# Altium PCB Sensor_Box_PoE_discrete.PCBDOC
Units mm, origin at the board's own origin, x right, y up, seen from the top; angles counter-clockwise.
Board outline 21.65 x 73.05 mm, 2 copper layers (Top, Bot), stack 1.571 mm thick; 64 components, 47 nets, 193 pads, 0 vias.
Unrouted connection lines stored in the file: 125.
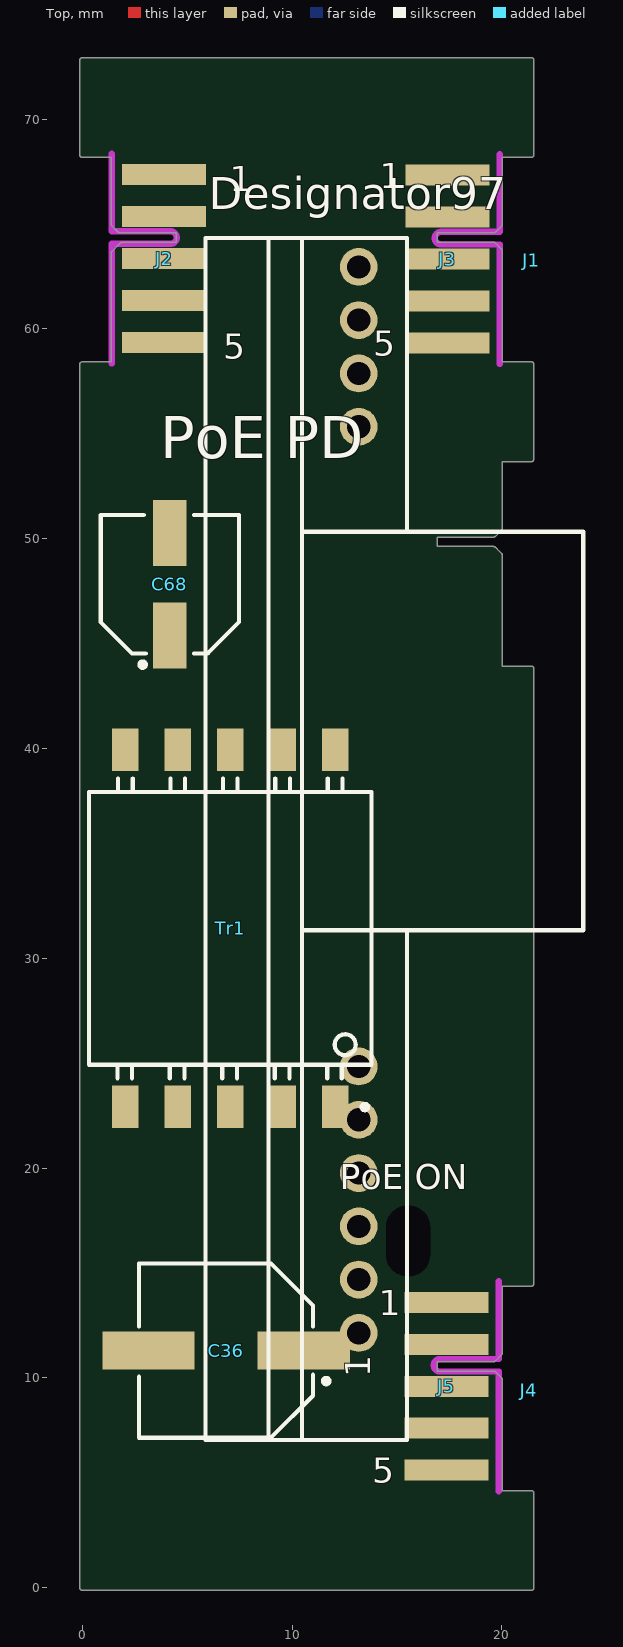
[diagram p0: Top view]
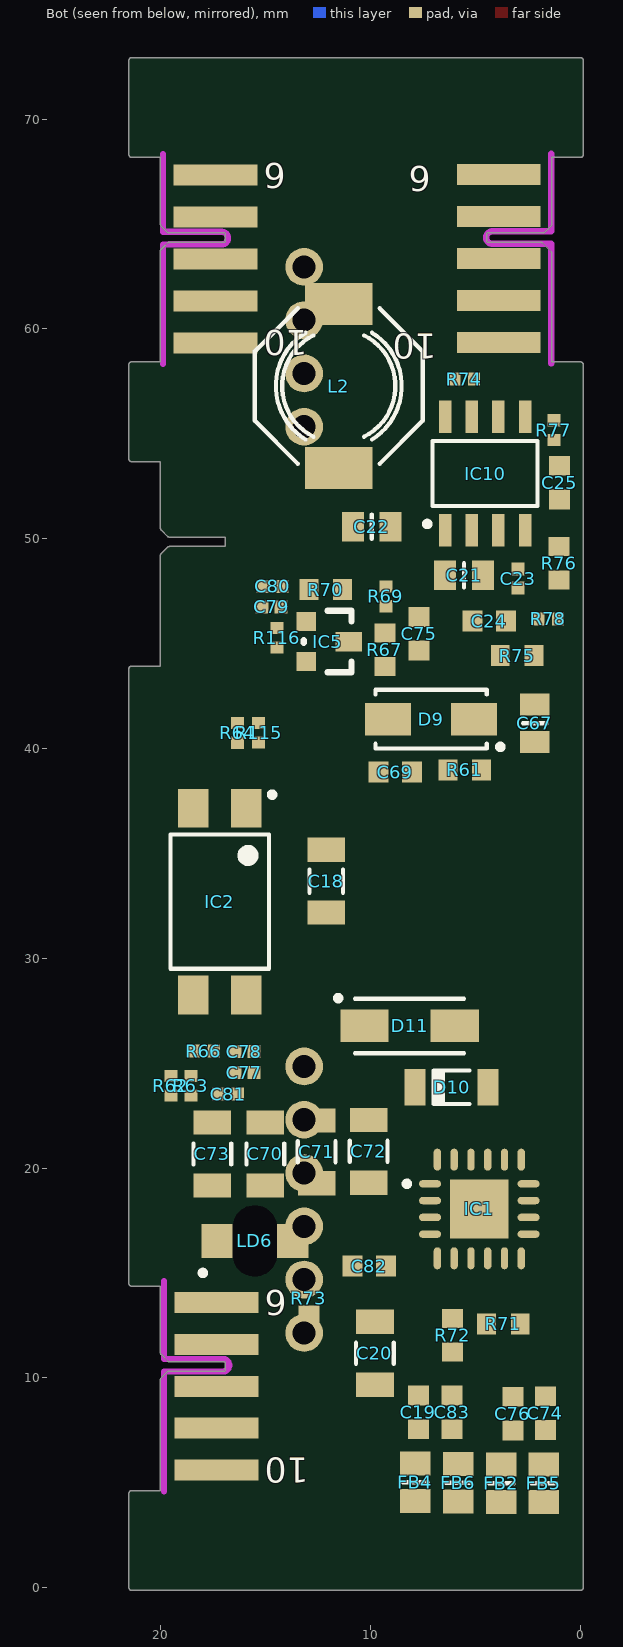
[diagram p1: Bot view, seen from below]

## Layer stack, top to bottom
TopSolder: solder mask 0.0102, Solder Resist, Dk 3.5
Top: signal copper 0.0356
Dielectric1: core 1.5, FR-4, Dk 4.8
Bot: signal copper 0.0356
BottomSolder: solder mask 0.0102, Solder Resist, Dk 3.5

## Board outline
0.002,-0.127 cw(c0,0) -0.127,0 -0.127,0.35 cw(c0,0.35) -0.127,0.351 -0.127,43.8 cw(c0,43.8) -0.127,43.802 -0.127,58.3 cw(c0,58.3) 0,58.427 1.373,58.427 1.373,63.6 cw(c1.5,63.6) 1.41,63.69 1.81,64.09 1.809,64.09 cw(c1.9,64) 1.9,64.127 4.473,64.127 4.473,64.573 1.8,64.573 cw(c1.8,64.7) 1.709,64.61 1.71,64.61 1.41,64.91 1.41,64.909 cw(c1.5,65) 1.373,65 1.373,68.173 0,68.173 cw(c0,68.3) -0.127,68.3 -0.127,72.8 cw(c0,72.8) 0,72.927 21.4,72.927 cw(c21.4,72.8) 21.527,72.8 21.527,68.3 cw(c21.4,68.3) 21.4,68.173 20.027,68.173 20.027,65 cw(c19.9,65) 19.99,64.909 19.99,64.91 19.69,64.61 19.691,64.61 cw(c19.6,64.7) 19.6,64.573 16.927,64.573 16.927,64.127 19.6,64.127 cw(c19.6,64) 19.691,64.09 19.69,64.09 19.891,63.89 ccw(c19.8,63.8) 19.89,63.89 ccw(c19.8,63.8) 19.89,63.89 19.891,63.89 19.99,63.79 cw(c19.9,63.7) 20.027,63.7 20.027,58.427 21.4,58.427 cw(c21.4,58.3) 21.527,58.3 21.527,53.8 cw(c21.4,53.8) 21.4,53.673 20.027,53.673 20.027,50.5 cw(c19.9,50.5) 19.99,50.409 19.99,50.41 19.69,50.11 19.691,50.11 cw(c19.6,50.2) 19.6,50.073 16.927,50.073 16.927,49.627 19.6,49.627 cw(c19.6,49.5) 19.691,49.59 19.69,49.59 19.891,49.39 ccw(c19.8,49.3) 19.89,49.39 ccw(c19.8,49.3) 19.89,49.39 19.891,49.39 19.99,49.29 cw(c19.9,49.2) 20.027,49.2 20.027,43.927 21.4,43.927 cw(c21.4,43.8) 21.527,43.8 21.527,14.5 cw(c21.4,14.5) 21.4,14.373 20.027,14.373 20.027,11.2 cw(c19.9,11.2) 19.99,11.109 19.99,11.11 19.69,10.81 cw(c19.6,10.9) 19.6,10.773 16.927,10.773 16.927,10.327 19.6,10.327 cw(c19.6,10.2) 19.69,10.29 19.99,9.99 cw(c19.9,9.9) 20.027,9.9 20.027,4.627 21.4,4.627 cw(c21.4,4.5) 21.527,4.5 21.527,0 ccw(c21.4,0) 21.527,0.001 21.527,0 cw(c21.4,0) 21.519,-0.045 cw(c21.4,0) 21.398,-0.127

## Design rules (kind name [scope] priority, off if disabled: settings)
Clearance Clearance_DIFF [(InDifferentialPairClass('All Differential Pairs'))] p1: gap=0.127 ignorepadtopadclearanceinfootprint=FALSE except(0: Arc-Hole Track-Hole SMDPad-Hole THPad-Hole Via-Hole Fill-Hole Poly-Hole Region-Hole Text-Hole; 0.254: Arc-Poly Track-Poly SMDPad-Poly THPad-Poly Via-Poly Fill-Poly Poly-Poly Poly-Region Poly-Text)
Clearance [All] p2: gap=0.127 ignorepadtopadclearanceinfootprint=FALSE except(0: Arc-Hole Track-Hole SMDPad-Hole THPad-Hole Via-Hole Fill-Hole Poly-Hole Region-Hole Text-Hole; 0.381: Arc-Poly Track-Poly SMDPad-Poly THPad-Poly Via-Poly Fill-Poly Poly-Poly)
DiffPairsRouting [All] p1: maxlimit=0.254 minlimit=0.127 mostfreqgap=0.127 toplayer_minwidth=0.127 toplayer_maxwidth=0.381 toplayer_prefwidth=0.254 bottomlayer_minwidth=0.127 bottomlayer_maxwidth=0.381 bottomlayer_prefwidth=0.254 maxuncoupledlength=12.7
FabricationTestPointUsage TestPointUsage [All] p1: valid=0 allowmultiple=FALSE
FabricationTestpoint Testpoint [All] p1: side=3 testpointundercomponent=TRUE minsize=1.016 maxsize=2.54 preferedsize=1.524 minholesize=0.508 maxholesize=1.016 preferedholesize=0.813 testpointgrid=0.025 allowsidetop=TRUE allowsidebottom=TRUE usegrid=TRUE gridtolerance=0
HoleSize [All] p1: absolutevalues=TRUE maxlimit=3.81 minlimit=0.025 maxpercent=80.000 minpercent=20.000
HoleToHoleClearance [All] p1: gap=0.025 allowstackedmicrovias=TRUE
MinimumSolderMaskSliver [All] p1: minsoldermaskwidth=0
PlaneClearance [All] p1: clearance=0.254
PlaneConnect [All] p1: planeconnectstyle=Direct reliefexpansion=0.508 reliefentries=4 reliefconductorwidth=0.254 reliefairgap=0.254
PolygonConnect PolygonConnect_pad [(InPadClass('All Pads'))] p1: connectstyle=Relief reliefconductorwidth=0.254 reliefentries=4 polygonreliefangle="90 Angle" airgapwidth=0.254
PolygonConnect [All] p2: connectstyle=Direct reliefconductorwidth=0.254 reliefentries=4 polygonreliefangle="45 Angle" airgapwidth=0.254
RoomDefinition Sensor_Box_PoE [InComponentClass('Sensor_Box_PoE')] p1 off: confinementstyle=ConfineIn formatcopy=TRUE lockcomponents=FALSE outline 69.55,15.15 252.299,15.15 252.299,38.9 69.55,38.9
RoutingVias [All] p1: holewidth=0.2 width=0.5 viastyle="Through Hole" minholewidth=0.2 minwidth=0.5 maxholewidth=0.711 maxwidth=1.27
SilkToSilkClearance [All] p1: silktosilkclearance=0
SilkToSolderMaskClearance SilkscreenOverComponentPads [IsPad] p1: minsilkscreentomaskgap=0 clearancetoexposedcopper=TRUE
SolderMaskExpansion [All] p1: expansion=0.051
Width [All] p1: maxlimit=1.27 minlimit=0.127 preferedwidth=0.127
20 further rules are at their usual default settings.

## Components (designator, comment, footprint, x,y, rotation, side; value= is the part's Value field where it differs from the comment)
C18 "1nF" CAPC3216X180N 12.125,33.675 r90 bottom
C19 "1nF" CAPC1608X87N 7.725,8.35 r270 bottom
C20 "100nF" CAPC3216X140N 9.8,11.175 r90 bottom
C21 "10uF" CAPC2012X135N 5.55,48.25 r0 bottom
C22 "10uF" CAPC2012X135N 9.95,50.575 r180 bottom
C23 "100nF" CAPC1005X55N 2.975,48.1 r270 bottom
C24 "150pF" CAPC1608X87N 4.35,46.075 r0 bottom
C25 "3.9nF" CAPC1608X87N 1,52.675 r90 bottom
C36 "10uF" CAPAE830X1020N 6.85,11.3 r180 top
C67 "10uF" CAPC2012X135N 2.175,41.2 r270 bottom
C68 "100uF" CAPAE660X540N 4.175,47.825 r90 top
C69 "68pF" CAPC1608X87N 8.825,38.875 r180 bottom
C70 "100nF" CAPC3216X140N 15.025,20.675 r270 bottom
C71 "100nF" CAPC3216X140N 12.575,20.775 r270 bottom
C72 "100nF" CAPC3216X140N 10.1,20.8 r270 bottom
C73 "100nF" CAPC3216X140N 17.55,20.675 r270 bottom
C74 "1nF" CAPC1608X87N 1.675,8.325 r90 bottom
C75 "3.9nF" CAPC1608X87N 7.7,45.475 r270 bottom
C76 "1nF" CAPC1608X87N 3.225,8.3 r270 bottom
C77 "100nF" CAPC1005X55N 16.025,24.55 r0 bottom
C78 "100nF" CAPC1005X55N 16.025,25.55 r0 bottom
C79 "100nF" CAPC1005X55N 14.725,46.75 r0 bottom
C80 "100nF" CAPC1005X55N 14.675,47.725 r0 bottom
C81 "100nF" CAPC1005X55N 16.8,23.525 r0 bottom
C82 "1uF" CAPC1608X87N 10.075,15.325 r180 bottom
C83 "1nF" CAPC1608X87N 6.125,8.35 r90 bottom
D9 "SS16" DIOM5127X229N 7.125,41.4 r0 bottom
D10 "PMLL4148L" DIOMELF3515N 6.15,23.85 r180 bottom
D11 "SMAJ24A" DIOM5226X262N 8.15,26.775 r180 bottom
Designator97 "Comment" SILVERTEL_AG5300 13.175,37.55 r90 top
FB2 "220R@100MHz" INDC2012X105N 3.775,4.975 r270 bottom
FB4 "220R@100MHz" INDC2012X105N 7.875,5.025 r270 bottom
FB5 "220R@100MHz" INDC2012X105N 1.75,4.975 r90 bottom
FB6 "220R@100MHz" INDC2012X105N 5.825,5 r90 bottom
IC1 "SI3402-B-GM" QFN80P500X500X80-21N-S280 4.825,18.05 r180 bottom
IC2 "SFH6106-4" SOIC254P977X406-4N 17.2,32.7 r270 bottom
IC5 "TLV431ASN1T1" SOT-23 13.075,46.05 r270 bottom
IC10 "NCP3170ADR2G" SOIC127P600X175-8N 4.55,53.1 r90 bottom
J1 "Family" "AVX_00 9159 010 061 916" 21.4,63.275 r0 top
J2 "Family" EDGE10T1B6_P200W1000L0F100X400 3.9,67.35 r270 top
J3 "Family" EDGE10T5B10_P200W1000L0F100X400 17.4,59.325 r90 top
J4 "Family" "AVX_00 9159 010 061 916" 21.275,9.4 r180 top
J5 "Family" EDGE10T5B10_P200W1000L0F100X400 17.35,5.6 r90 top
L2 "6.8uH" IND_BOURNS_SRU8043 11.525,57.275 r270 bottom
LD6 "Green" LED_KINGBRIGHT_KPTR3216 15.525,16.525 r0 bottom
R61 "30" RESC1608X55N 5.525,38.975 r180 bottom
R62 "10k" RESC1005X40N 19.525,23.925 r270 bottom
R63 "10k" RESC1005X40N 18.575,23.925 r270 bottom
R64 "10k" RESC1005X40N 16.343,40.744 r270 bottom
R66 "300" RESC1005X40N 17.95,25.575 r0 bottom
R67 "130k" RESC1608X55N 9.325,44.7 r270 bottom
R69 "2k" RESC1005X40N 9.275,47.25 r90 bottom
R70 "15k" RESC1608X55N 12.15,47.575 r0 bottom
R71 "30" RESC1608X55N 3.675,12.575 r0 bottom
R72 "24k" RESC1608X55N 6.1,12.025 r90 bottom
R73 "24k" RESC1608X55N 12.95,13.8 r270 bottom
R74 "10k" RESC1005X40N 5.55,57.6 r180 bottom
R75 "43k" RESC1608X55N 3.025,44.425 r0 bottom
R76 "8k2" RESC1608X55N 1.025,48.825 r270 bottom
R77 "10k" RESC1005X40N 1.275,55.175 r90 bottom
R78 "1k" RESC1005X40N 1.55,46.175 r0 bottom
R115 "10k" RESC1005X40N 15.35,40.75 r270 bottom
R116 "10k" RESC1005X40N 14.475,45.275 r270 bottom
Tr1 "1:1" XFMR_COILCRAFT_FA2925-AL 7.05,31.425 r90 top (schematic designator TR1)

## Footprints (in the part's own frame and the unit in brackets; to place one, negate y for a bottom-side part, rotate by r counter-clockwise, add the part's x,y. Pads: shape width x height; smd on the part's side, far side on the other; paste and mask are expansions set on the pad)
"AVX_00 9159 010 061 916" [mm] "10 Contacts, 2mm Pitch, Open Ended Card Edge Connector, 9159 Series"
  body extent -5,-4.95 5,4.95, height 1.7
CAPAE660X540N [mm] "Capacitor, Aluminium Electrolytric, 6.6mm L X 6.6mm W X 5.4mm H, IPC Medium Density"
  rect 3.15x1.6 smd: 1(-2.45,0) 2(2.45,0)
  silkscreen extent -3.95,-3.3 3.3,3.3, body extent -3.9,-3.4 3.9,3.4, height 5.7
CAPAE830X1020N [mm] "Capacitor, Aluminium Electrolytric, 8.3mm L X 8.3mm W X 10.2mm H, IPC Medium Density"
  rect 4.4x1.8 smd: 1(-3.7,0) 2(3.7,0)
  silkscreen extent -4.9,-4.15 4.15,4.15, body extent -4.75,-4.25 5.25,4.25, height 10.2
CAPC1005X55N [mm] "Chip Capacitor, Body 1.0x0.55mm, IPC Medium Density"
  rect 0.62x0.62 smd: 1(-0.45,0) 2(0.45,0)
  body extent -0.52,-0.27 0.53,0.28, height 0.55
CAPC1608X87N [mm] "Chip Capacitor, Body 1.6x0.8mm IPC Medium Density"
  rect 0.95x1 smd: 1(-0.8,0) 2(0.8,0)
  body extent -0.87,-0.47 0.88,0.48, height 0.87
CAPC2012X135N [mm] "Chip Capacitor, Body 2.0x1.25mm, IPC Medium Density"
  rect 1.05x1.4 smd: 1(-0.9,0) 2(0.9,0)
  silkscreen extent 0,-0.58 0,0.58, body extent -1.05,-0.67 1.05,0.68, height 1.25
CAPC3216X140N [mm] "Chip Capacitor, Body 3.2x1.6mm, IPC Medium Density"
  rect 1.15x1.8 smd: 1(-1.5,0) 2(1.5,0)
  silkscreen extent -0.5,-0.9 0.5,0.9, body extent -1.7,-0.9 1.7,0.9, height 1.4
CAPC3216X180N [mm] "Chip Capacitor, Body 3.2x1.6mm, IPC Medium Density"
  rect 1.15x1.8 smd: 1(-1.5,0) 2(1.5,0)
  silkscreen extent -0.55,-0.8 0.55,0.8, body extent -1.7,-0.9 1.7,0.9, height 1.8
DIOM5127X229N [mm] "DO-214-AC/SMA Molded Diode, 2-Leads, Body 5.1x2.7mm, IPC Medium Density"
  rect 2.2x1.55 smd: 1(-2.05,0) 2(2.05,0)
  silkscreen extent -3.42,-1.4 2.65,1.45, body extent -2.67,-1.45 2.68,1.45, height 2.29
DIOM5226X262N [mm] "DO-214-AC/SMA Diode, Molded Body; 5.21mm L X 2.605mm W X 2.62mm H, IPC Medium Density"
  rect 2.3x1.55 smd: 1(-2.15,0) 2(2.15,0)
  silkscreen extent -3.53,-1.3 2.6,1.45, body extent -2.6,-1.3 2.6,1.31, height 2.62
DIOMELF3515N [mm] "SOD80C, MELF Diode, 2-Leads, Body 3.5x1.5mm, IPC Medium Density"
  rect 1x1.75 smd: 1(-1.75,0) 2(1.75,0)
  silkscreen extent -0.85,-0.8 0.85,0.8, body extent -1.85,-0.8 1.85,0.8, height 1.6
EDGE10T1B6_P200W1000L0F100X400 [mm] "10 contacts Board Edge Connector, First Left Top Pad 1, First Left Bottom Pad 2, Pitch 2mm, Length 0mm, Width 10mm, Finger Lenght 4mm, Finger Width 1mm"
  rect 1x4 smd paste-0.5: 1(0,0) 2(2,0) 3(4,0) 4(6,0) 5(8,0)
  rect 1x4 smd far side paste-0.5: 6(0,0) 7(2,0) 8(4,0) 9(6,0) 10(8,0)
  KeepOutLayer lines w0.3: 9,-2.5 3.3,-2.5 3.3,0.3 ccw(c3,0.3) 2.7,0.3 2.7,-2.5 -1,-2.5
EDGE10T5B10_P200W1000L0F100X400 [mm] "10 contacts Board Edge Connector, First Left Top Pad 5, First Left Bottom Pad 10, Pitch 2mm, Length 0mm, Width 10mm, Finger Lenght 4mm, Finger Width 1mm"
  rect 1x4 smd paste-0.5: 1(8,0) 2(6,0) 3(4,0) 4(2,0) 5(0,0)
  rect 1x4 smd far side paste-0.5: 6(8,0) 7(6,0) 8(4,0) 9(2,0) 10(0,0)
  KeepOutLayer lines w0.3: -1,-2.5 4.7,-2.5 4.7,0.3 cw(c5,0.3) 5.3,0.3 5.3,-2.5 9,-2.5
IND_BOURNS_SRU8043 [mm] "SMD Inductor Body Width 8.3mm Body Lenght 8.3mm Height 4.6mm"
  rect 2x3.2 smd: 1(-3.9,0) 2(3.9,0)
  silkscreen extent -3.71,-4 3.71,4, body extent -4,-4 4,4, height 4.3
INDC2012X105N [mm] "Chip Inductor, EIA 0805, Metric 2012, Body 2.0x1.25mm, IPC Medium Density"
  rect 1.15x1.45 smd: 1(-0.9,0) 2(0.9,0)
  silkscreen extent 0,-0.6 0,0.6, body extent -1.1,-0.7 1.1,0.7, height 1.1
LED_KINGBRIGHT_KPTR3216 [mm] "Reverse Mount LED 3216, Hole 2.1x2.3mm 0.35mm Height"
  rect 1.5x1.6 smd: 1(1.8,0) 2(-1.8,0)
  oval 1.9x3.2 hole 2.1 slot 3.4 at 90 deg unplated mask+0.1: 3(0,0)
  silkscreen extent 2.35,1.4 2.6,1.65, body extent -1.6,-0.8 1.6,0.8, height 0.25
QFN80P500X500X80-21N-S280 [mm] "QFN, 0.80mm Pitch, Square 20 Pin, 5.00mm L X 5.00mm W X 0.80mm H body (W/Thermal Tab 2.8mm X 2.8mm), IPC Medium Density"
  oval 1.05x0.35 smd: 1(-2.35,1.2) 2(-2.35,0.4) 3(-2.35,-0.4) 4(-2.35,-1.2) 11(2.35,-1.2) 12(2.35,-0.4) 13(2.35,0.4) 14(2.35,1.2)
  oval 0.35x1.05 smd: 5(-2,-2.35) 6(-1.2,-2.35) 7(-0.4,-2.35) 8(0.4,-2.35) 9(1.2,-2.35) 10(2,-2.35) 15(2,2.35) 16(1.2,2.35) 17(0.4,2.35) 18(-0.4,2.35) 19(-1.2,2.35) 20(-2,2.35)
  rect 2.8x2.8 smd: 21(0,0)
  silkscreen extent -3.58,1.08 -3.33,1.32, body extent -2.55,-2.55 2.55,2.55, height 0.9
RESC1005X40N [mm] "Chip Resistor, EIA 0402, Metric 1005, Body 1.0x0.5mm, IPC Medium Density"
  rect 0.58x0.62 smd: 1(-0.47,0) 2(0.47,0)
  body extent -0.52,-0.27 0.53,0.28, height 0.4
RESC1608X55N [mm] "Chip Resistor, EIA 0603, Metric 1608, Body 1.6x0.8mm, IPC Medium Density"
  rect 0.9x1 smd: 1(-0.8,0) 2(0.8,0)
  body extent -0.87,-0.47 0.88,0.48, height 0.55
SILVERTEL_AG5300 [mm] "Power-over-Ethernet Plus (POE+) Module, Body L 57.3mm x W 18mm x H 14mm"
  round 1.8 hole 1.1: 1(-25.406,0) 2(-22.866,0) 3(-20.326,0) 4(-17.786,0) 5(-15.246,0) 6(-12.706,0) 7(17.786,0) 8(20.326,0) 9(22.866,0) 10(25.406,0)
  silkscreen extent -30.52,-10.7 26.78,7.3, body extent -30.52,-10.7 26.78,7.3, height 14
SOIC127P600X175-8N [mm] "SOIC 8, Pitch 1.27mm - Body 4x5mm, IPC Medium Density"
  rect 1.55x0.6 smd: 1(-2.7,1.905) 2(-2.7,0.635) 3(-2.7,-0.635) 4(-2.7,-1.905) 5(2.7,-1.905) 6(2.7,-0.635) 7(2.7,0.635) 8(2.7,1.905)
  silkscreen extent -2.52,-2.5 1.55,2.88, body extent -3.1,-2.5 3.1,2.5, height 1.75
SOIC254P977X406-4N [mm] "SOIC, 2.54mm pitch; 4 pin, 6.65mm W X 4.69mm L, IPC Medium Density"
  rect 1.85x1.45 smd: 1(-4.45,1.27) 2(-4.45,-1.27) 3(4.45,-1.27) 4(4.45,1.27)
  silkscreen extent -5.22,-2.35 3.2,2.62, body extent -5.01,-2.41 5.02,2.42, height 4.06
SOT-23 [mil]
  rect 36x36 smd: 1(0,0) 2(75,0)
  rect 36x50 smd: 3(38,80)
  silkscreen extent -20,-5 95,85, body extent -21,-5 97,93, height 47
XFMR_COILCRAFT_FA2925-AL [mm] "Flyback Transformer, Body 13 x 13.46mm"
  rect 2.03x1.27 smd: 1(-8.51,-5) 2(-8.51,-2.5) 3(-8.51,0) 4(-8.51,2.5) 5(-8.51,5) 6(8.51,5) 7(8.51,2.5) 8(8.51,0) 9(8.51,-2.5) 10(8.51,-5)
  silkscreen extent -8.64,-6.73 7.14,6.73, body extent -8.87,-6.73 8.88,6.73, height 12.7

## Part data
C18: library part CC1206_1NF_2KV_10%_X7R, "Non-polarised capacitor", Case=1206, Manufacturer=GENERIC, Manufacturer1 ComponentHeight=1.8mm, Manufacturer1 Example=AVX, Manufacturer1 Part Number=1206GC102KAT2A, Tolerance=±10%, Voltage=2kV, Author="CERN DEM JLC", Component Type=Standard, CreateDate=19.11.2012, HelpURL=\\cern.ch\dfs\Applications\Altium\Datasheets\CC1206_X7R_AVX_HV-MLC.pdf, LatestRevisionDate=17.05.2017, Manufacturer Part Number=CC1206_1NF_2KV_10%_X7R, Mounted=Yes, Part Description="High Voltage MLC Chip Capacitor", Part Number=CC1206_1NF_2KV_10%_X7R, Pin Count=2, Sense=No, SMD=Yes, Socket=No, Status=None, TC=X7R
C19 C74 C76 C83: library part CC0603_1NF_100V_10%_X7R, "Non-polarised capacitor", Case=0603, Manufacturer=GENERIC, Manufacturer1 ComponentHeight=0.87mm, Manufacturer1 Example=KEMET, Manufacturer1 Part Number=C0603C102K1RACTU, Tolerance=±10%, Voltage=100V, Author="CERN DEM JLC", Component Type=Standard, CreateDate=12.12.2013, HelpURL=\\cern.ch\dfs\Applications\Altium\Datasheets\CC0603_X7R_KEMET.pdf, LatestRevisionDate=12.12.2013, Manufacturer Part Number=CC0603_1NF_100V_10%_X7R, Mounted=Yes, Part Description="SMD Multilayer Chip Ceramic Capacitor", Part Number=CC0603_1NF_100V_10%_X7R, Pin Count=2, Sense=No, SMD=Yes, Socket=No, Status=Preferred, TC=X7R
C20 C70 C71 C72 C73: library part CC1206_100NF_100V_10%_X7R, "Non-polarised capacitor", Case=1206, Manufacturer=GENERIC, Manufacturer1 ComponentHeight=1.25mm, Manufacturer1 Example=PHYCOMP, Manufacturer1 Part Number=222260115649, Tolerance=±10%, Voltage=100V, Author="CERN DEM JLC", Component Type=Standard, CreateDate=24.08.2009, HelpURL=\\cern.ch\dfs\Applications\Altium\Datasheets\CC1206_X7R_PHYCOMP.pdf, LatestRevisionDate=24.08.2009, Manufacturer Part Number=CC1206_100NF_100V_10%_X7R, Mounted=Yes, Part Description="SMD Multilayer Chip Ceramic Capacitor", Part Number=CC1206_100NF_100V_10%_X7R, Pin Count=2, Sense=No, SMD=Yes, Socket=No, Status=Preferred, TC=X7R
C21 C22 C67: library part CC0805_10UF_10V_10%_X7R, "Non-polarised capacitor", Case=0805, Manufacturer=GENERIC, Manufacturer1 ComponentHeight=1.35mm, Manufacturer1 Example=MURATA, Manufacturer1 Part Number=GRM21BR71A106KE51L, Tolerance=±10%, Voltage=10V, Author="CERN DEM JLC", Component Type=Standard, CreateDate=2012-04-30, HelpURL=\\cern.ch\dfs\Applications\Altium\Datasheets\CC0805_X7R_MURATA.pdf, LatestRevisionDate=2012-04-30, Manufacturer Part Number=CC0805_10UF_10V_10%_X7R, Mounted=Yes, Part Description="SMD Multilayer Chip Ceramic Capacitor", Part Number=CC0805_10UF_10V_10%_X7R, Pin Count=2, SMD=Yes, Socket=No, Status=Preferred, Table="Capacitors SMD", TC=X7R
C23 C77 C78 C79 C80 C81: library part CC0402_100NF_16V_10%_X5R, "Non-polarised capacitor", Case=0402, Manufacturer=GENERIC, Manufacturer1 ComponentHeight=0.55mm, Manufacturer1 Example=MURATA, Manufacturer1 Part Number=GRM155R61C104KA88D, Tolerance=±10%, Voltage=16V, Author="CERN DEM JLC", Component Type=Standard, CreateDate=10.12.2013, HelpURL=\\cern.ch\dfs\Applications\Altium\Datasheets\CC0402_X5R_MURATA_GRM.pdf, LatestRevisionDate=10.12.2013, Manufacturer Part Number=CC0402_100NF_16V_10%_X5R, Mounted=Yes, Part Description="SMD Multilayer Chip Ceramic Capacitor", Part Number=CC0402_100NF_16V_10%_X5R, Pin Count=2, Sense=No, SMD=Yes, Socket=No, Status=None, TC=X5R
C24: library part CC0603_150PF_50V_1%_NP0, "Non-polarised capacitor", Case=0603, Manufacturer=GENERIC, Manufacturer1 ComponentHeight=0.7mm, Manufacturer1 Example=PHYCOMP, Manufacturer1 Part Number=CC0603FRNPO9BN151, Tolerance=±1%, Voltage=50V, Author="CERN DEM MR", Component Type=Standard, CreateDate=17.02.2016, HelpURL=\\cern.ch\dfs\Applications\Altium\Datasheets\CC0805_NP0_PHYCOMP_16VTO50V.pdf, LatestRevisionDate=17.02.2016, Manufacturer Part Number=CC0603_150PF_50V_1%_NP0, Mounted=Yes, Part Description="SMD Multilayer Chip Ceramic Capacitor", Part Number=CC0603_150PF_50V_1%_NP0, Pin Count=2, Sense=No, SMD=Yes, Socket=No, Status=None, TC=C0G/NP0
C25 C75: library part CC0603_3.9NF_50V_5%_X7R, "Non-polarised capacitor", Case=0603, Manufacturer=GENERIC, Manufacturer1 ComponentHeight=0.87mm, Manufacturer1 Example=PHYCOMP, Manufacturer1 Part Number=223858615631, Tolerance=±5%, Voltage=50V, Author="CERN DEM JLC", Component Type=Standard, CreateDate=03.12.2007, HelpURL=\\cern.ch\dfs\Applications\Altium\Datasheets\CC0603_X7R_PHYCOMP.pdf, LatestRevisionDate=03.12.2007, Manufacturer Part Number=CC0603_3.9NF_50V_5%_X7R, Mounted=Yes, Part Description="SMD Multilayer Chip Ceramic Capacitor", Part Number=CC0603_3.9NF_50V_5%_X7R, Pin Count=2, Sense=No, SMD=Yes, Socket=No, Status=Preferred, TC=X7R
C36: "10uF, 100V, 1.5R", Case=F, Manufacturer=PANASONIC, Manufacturer Part Number=EEEHD2A100P, Part Number=CAE830-1020_10UF_100V_20%, Tolerance=±20%, Voltage=100V, Author="CERN DEM JLC", ComponentHeight=10.2mm, Component Type=Standard, CreateDate=2007-12-03, HelpURL=\\cern.ch\dfs\Applications\Altium\Datasheets\CAE_PANASONIC_FK.pdf, LatestRevisionDate=2014-11-05, Mounted=Yes, Part Description="Aluminum Electrolytic SMT Capacitor", Pin Count=2, SMD=Yes, Socket=No, Status=Recommended, Table="Capacitors SMD"
C68: library part CAE660-540_100UF_16V_20%, "Polarised capacitor", Case=D, Manufacturer=PANASONIC, Manufacturer Part Number=EEEFK1C101AP, Tolerance=±20%, Voltage=16V, Author="CERN DEM JLC", ComponentHeight=5.8mm, Component Type=Standard, CreateDate=03.12.2007, HelpURL=\\cern.ch\dfs\Applications\Altium\Datasheets\CAE_PANASONIC_FK.pdf, LatestRevisionDate=05.11.2014, Mounted=Yes, Part Description="Aluminum Electrolytic SMT Capacitor", Part Number=CAE660-540_100UF_16V_20%, Pin Count=2, Sense=No, SMD=Yes, Socket=No, Status="Not Recommended"
C69: library part CC0603_68PF_50V_5%_NP0, "Non-polarised capacitor", Case=0603, Manufacturer=GENERIC, Manufacturer1 ComponentHeight=0.87mm, Manufacturer1 Example=PHYCOMP, Manufacturer1 Part Number=223886715689, Tolerance=±5%, Voltage=50V, Author="CERN DEM JLC", Component Type=Standard, CreateDate=03.12.2007, HelpURL=\\cern.ch\dfs\Applications\Altium\Datasheets\CC0603_NP0_PHYCOMP.pdf, LatestRevisionDate=03.12.2007, Manufacturer Part Number=CC0603_68PF_50V_5%_NP0, Mounted=Yes, Part Description="SMD Multilayer Chip Ceramic Capacitor", Part Number=CC0603_68PF_50V_5%_NP0, Pin Count=2, Sense=No, SMD=Yes, Socket=No, Status=Preferred, TC=C0G/NP0
C82: library part CC0603_1UF_16V_10%_X7R, "Non-polarised capacitor", Case=0603, Manufacturer=GENERIC, Manufacturer1 ComponentHeight=0.9mm, Manufacturer1 Example="YAGEO PHYCOMP", Manufacturer1 Part Number=223878615663, Manufacturer Part Number=CC0603_1uF_16V_10%_X7R, Tolerance=±10%, Voltage=16V, Author="CERN DEM JLC", Component Type=Standard, CreateDate=03.12.2007, HelpURL=\\cern.ch\dfs\Applications\Altium\Datasheets\CC0603_X7R_PHYCOMP.pdf, LatestRevisionDate=17.04.2015, Mounted=Yes, Part Description="SMD Multilayer Chip Ceramic Capacitor", Part Number=CC0603_1UF_16V_10%_X7R, Pin Count=2, Sense=No, SMD=Yes, Socket=No, Status=None, TC=X7R
D9: "Schottky Diode", Case=DO-214AC, Manufacturer="VISHAY GENERAL SEMICONDUCTOR", Power=1A, Voltage=60V, Author="CERN DEM JLC", Bonding=No, ComponentHeight=2.29mm, Component Type=Standard, CreateDate=15.07.2008, Device=SS16, HelpURL=\\cern.ch\dfs\Applications\Altium\Datasheets\SS16.pdf, LatestRevisionDate=23.08.2010, Manufacturer Part Number=SS16, Mounted=Yes, PackageDescription="DO-214-AC Molded Diode, Body 5.1x2.7mm, IPC Medium Density", Part Description="Surface Mount Schottky Barrier Rectifier", Part Number=SS16, Pin Count=2, PressFit=No, Sense=No, SMD=Yes, Socket=No
D10: "Diode", Case=SOD-80C, Manufacturer="NXP SEMICONDUCTORS", Power=200mA, Voltage=75V, Author="CERN DEM JLC", Bonding=No, ComponentHeight=1.6mm, Component Type=Standard, CreateDate=30.03.2009, Device=PMLL4148L, HelpURL=\\cern.ch\dfs\Applications\Altium\Datasheets\PMLL4148L.pdf, LatestRevisionDate=09.12.2009, Manufacturer Part Number=PMLL4148L, Mounted=Yes, PackageDescription="SOD80C, MELF Diode, 2-Leads, Body 3.5x1.5mm, IPC Medium Density", Part Description="High-speed switching diodes", Part Number=PMLL4148L, Pin Count=2, PressFit=No, Sense=No, SMD=Yes, Socket=No, Status="Not recommended"
D11: "Transient Voltage Suppressor Diode (Uni-Directional)", Case=DO-214AC, Manufacturer=BOURNS, Power=400W, Voltage=24V, Author="CERN DEM JLC", Bonding=No, ComponentHeight=2.62mm, Component Type=Standard, CreateDate=27.06.2011, Device=SMAJ24A, HelpURL=\\cern.ch\dfs\Applications\Altium\Datasheets\SMAJ24A.pdf, LatestRevisionDate=27.06.2011, Manufacturer Part Number=SMAJ24A, Mounted=Yes, PackageDescription="DO-214-AC/SMA Diode, Molded Body; 5.21mm L X 2.605mm W X 2.62mm H, IPC Medium Density", Part Description="Surface Mount Uni-directional Transient Voltage Suppressor Diode", Part Number=SMAJ24A, Pin Count=2, PressFit=No, Sense=No, SMD=Yes, Socket=No
FB2 FB4 FB5 FB6: library part IND0805_MURATA_BLM21PG221SN1D, "Inductor", Case=0805, Manufacturer=MURATA, Manufacturer Part Number=BLM21PG221SN1D, Power=2A, Resistance=0.05R, Tolerance=±25%, Author="CERN DEM JLC", ComponentHeight=1.05mm, Component Type=Standard, CreateDate=2010-01-25, HelpURL=\\cern.ch\dfs\Applications\Altium\Datasheets\IND0402_MURATA_BLM21P.pdf, LatestRevisionDate=2010-01-25, Mounted=Yes, Part Description="SMD EMIFIL Suppression Chip Ferrite Bead", Part Number=IND0805_MURATA_BLM21PG221SN1D, Pin Count=2, SMD=Yes, Socket=No, Status=None, Table="Inductors SMD"
IC1: "Fully Integrated IEEE 802.3 Compliant PoE PD Interface and Low-EMI Switching Regulator", Case=QFN20, Manufacturer="SILICON LABS", Author="CERN DEM MR", Bonding=No, ComponentHeight=0.8mm, Component Type=Standard, CreateDate=21.02.2018, Device=SI3402-B-GM, HelpURL=\\cern.ch\dfs\Applications\Altium\Datasheets\SI3402-B-GM.pdf, LatestRevisionDate=21.02.2018, Manufacturer Part Number=SI3402-B-GM, Mounted=Yes, PackageDescription="QFN, 0.80mm Pitch, Square 20 Pin, 5.00mm L X 5.00mm W X 0.80mm H body (W/Thermal Tab 2.8mm X 2.8mm), IPC Medium Density", Part Description="Fully Integrated IEEE 802.3 Compliant PoE PD Interface and Low-EMI Switching Regulator", Part Number=SI3402-B-GM, Pin Count=21, PressFit=No, Sense=No, SMD=Yes, Socket=No
IC2: "Single Optocoupler", Case=SOIC4, Manufacturer="VISHAY SEMICONDUCTORS", Author="CERN DEM MR", Bonding=No, ComponentHeight=4.06mm, Component Type=Standard, CreateDate=15.02.2018, Device=SFH6106-4, HelpURL=\\cern.ch\dfs\Applications\Altium\Datasheets\SFH6106-4.pdf, LatestRevisionDate=15.02.2018, Manufacturer Part Number=SFH6106-4, Mounted=Yes, PackageDescription="SOIC, 2.54mm pitch; 4 pin, 6.65mm W X 4.69mm L, IPC Medium Density", Part Description="Optocoupler, Phototransistor Output, High Reliability, 5300 VRMS", Part Number=SFH6106-4, Pin Count=4, PressFit=No, Sense=No, SMD=Yes, Socket=No
IC5: library part REF_TLV431_SOT23_16V, "16V 1.24V ADJ Voltage reference", Supplier Part Number 1=31K7719, Supplier 1=Newark
IC10: "Synchronous PWM Switching Converter", Case=SOIC8, Manufacturer="ON SEMICONDUCTOR", Author="CERN DEM MR", Bonding=No, ComponentHeight=1.75mm, Component Type=Standard, CreateDate=30.05.2016, Device=NCP3170ADR2G, HelpURL=\\cern.ch\dfs\Applications\Altium\Datasheets\NCP3170ADR2G.pdf, LatestRevisionDate=30.05.2016, Manufacturer Part Number=NCP3170ADR2G, Mounted=Yes, PackageDescription="SOIC 8, Pitch 1.27mm - Body 4x5mm, IPC Medium Density", Part Description="Synchronous PWM Switching Converter", Part Number=NCP3170ADR2G, Pin Count=8, PressFit=No, Sense=No, SMD=Yes, Socket=No
J1 J4: library part "AVX_00 9159 010 061 916", "Open Ended Card Edge Connector, 9159 Series", Manufacturer=AVX, Manufacturer Part Number="00 9159 010 061 916", Author="CERN DEM MR", ComponentHeight=1.6mm, Component Type=Standard, CreateDate=13.02.2018, HelpURL="\\cern.ch\dfs\Applications\Altium\Datasheets\AVX_00 9159 010 061 916.pdf", LatestRevisionDate=13.02.2018, Mounted=Yes, Part Description="10 Contacts, 2mm Pitch, Open Ended Card Edge Connector, 9159 Series", Part Number="AVX_00 9159 010 061 916", Pin Count=10, PressFit=No, Sense=No, SMD=No, Socket=No, Status=None
J2: library part EDGE10T1B6_P200W1000L0F100X400, "PCB Edge Connector 10 (2x5)", Author="CERN DEM MR", ComponentHeight=0mm, Component Type="Standard (No BOM)", CreateDate=14.02.2018, HelpURL=\\cern.ch\dfs\Applications\Altium\Datasheets\EDGE10T1B6_P200W1000L0F100X400.pdf, LatestRevisionDate=14.02.2018, Mounted=No, Part Description="10 Contacts Board Edge Connector, Pitch 2mm, Length 0mm, Width 10mm, Finger Lenght 4mm, Finger Width 1mm", Part Number=EDGE10T1B6_P200W1000L0F100X400, Pin Count=10, PressFit=No, Sense=No, SMD=No, Socket=No, Status=None
J3 J5: library part EDGE10T5B10_P200W1000L0F100X400, "PCB Edge Connector 10 (2x5)", Author="CERN DEM MR", ComponentHeight=0mm, Component Type="Standard (No BOM)", CreateDate=14.02.2018, HelpURL=\\cern.ch\dfs\Applications\Altium\Datasheets\EDGE10T5B10_P200W1000L0F100X400.pdf, LatestRevisionDate=14.02.2018, Mounted=No, Part Description="10 Contacts Board Edge Connector, Pitch 2mm, Length 0mm, Width 10mm, Finger Lenght 4mm, Finger Width 1mm", Part Number=EDGE10T5B10_P200W1000L0F100X400, Pin Count=10, PressFit=No, Sense=No, SMD=No, Socket=No, Status=None
L2: library part IND_6.8UH_30%_BOURNS_SRU8043, "Inductor", Manufacturer=BOURNS, Manufacturer Part Number=SRU8043-6R8Y, Power=3.8A, Resistance=0.0224R, Tolerance=±30%, Author="CERN DEM JMW", ComponentHeight=4.6mm, Component Type=Standard, CreateDate=06.08.2015, HelpURL=\\cern.ch\dfs\Applications\Altium\Datasheets\IND_BOURNS_SRU8043.pdf, LatestRevisionDate=06.08.2015, Mounted=Yes, Part Description="Shielded SMD Power Inductor", Part Number=IND_6.8UH_30%_BOURNS_SRU8043, Pin Count=2, Sense=No, SMD=Yes, Socket=No, Status=None
LD6: library part LED_KINGBRIGHT_KPTR-3216CGCK, "LED Green 1A 2C", Manufacturer=KINGBRIGHT, Manufacturer Part Number=KPTR-3216CGCK, Author="CERN DEM MR", Bonding=No, Color=Green, ComponentHeight=0.35mm, Component Type=Standard, CreateDate=15.02.2016, HelpURL=\\cern.ch\dfs\Applications\Altium\Datasheets\LED_KINGBRIGHT_KPTR-3216CGCK.pdf, LatestRevisionDate=15.02.2016, Mounted=Yes, PackageDescription="Reverse Mount LED 3216, Hole 2.1x2.3mm 0.35mm Height", Part Description="Reverse Mount LED 1.4x1.6mm Green", Part Number=LED_KINGBRIGHT_KPTR-3216CGCK, Pin Count=2, PressFit=No, Sense=No, SMD=Yes, Socket=No
R61 R71: library part R0603_30R_1%_0.1W_100PPM, "Resistor - 1%", Case=0603, Manufacturer=GENERIC, Manufacturer1 ComponentHeight=0.55mm, Manufacturer1 Example="NIC COMPONENT", Manufacturer1 Part Number=NRC06F30R0TRF, Power=0.1W, Tolerance=±1%, Author="CERN DEM JLC", Component Type=Standard, CreateDate=03.12.2007, HelpURL=\\cern.ch\dfs\Applications\Altium\Datasheets\R0603_NIC_NRC.pdf, LatestRevisionDate=13.03.2008, Manufacturer Part Number=R0603_30R_1%_0.1W_100PPM, Mounted=Yes, Part Description="General Purpose Thick Film Chip Resistor", Part Number=R0603_30R_1%_0.1W_100PPM, Pin Count=2, PressFit=No, Sense=No, SMD=Yes, Socket=No, Status=Preferred, TC=±100ppm/°C
R62 R63 R64 R74 R77 R115 R116: library part R0402_10K_1%_0.0625W_100PPM, "Resistor - 1%", Case=0402, Manufacturer=GENERIC, Manufacturer1 ComponentHeight=0.4mm, Manufacturer1 Example="YAGEO PHYCOMP", Manufacturer1 Part Number=232270671003L, Power=0.0625W, Tolerance=±1%, Author="CERN DEM JLC", Component Type=Standard, CreateDate=03.12.2007, HelpURL=\\cern.ch\dfs\Applications\Altium\Datasheets\R0402_Phycomp_RC0402.pdf, LatestRevisionDate=17.10.2012, Manufacturer Part Number=R0402_10K_1%_0.0625W_100PPM, Mounted=Yes, Part Description="General Purpose Thick Film Chip Resistor", Part Number=R0402_10K_1%_0.0625W_100PPM, Pin Count=2, PressFit=No, Sense=No, SMD=Yes, Socket=No, Status="Not Recommended", TC=±100ppm/°C
R66: library part R0402_300R_1%_0.0625W_100PPM, "Resistor - 1%", Case=0402, Manufacturer=GENERIC, Manufacturer1 ComponentHeight=0.4mm, Manufacturer1 Example="YAGEO PHYCOMP", Manufacturer1 Part Number=232270673001L, Power=0.0625W, Tolerance=±1%, Author="CERN DEM JLC", Component Type=Standard, CreateDate=03.12.2007, HelpURL=\\cern.ch\dfs\Applications\Altium\Datasheets\R0402_Phycomp_RC0402.pdf, LatestRevisionDate=17.10.2012, Manufacturer Part Number=R0402_300R_1%_0.0625W_100PPM, Mounted=Yes, Part Description="General Purpose Thick Film Chip Resistor", Part Number=R0402_300R_1%_0.0625W_100PPM, Pin Count=2, PressFit=No, Sense=No, SMD=Yes, Socket=No, Status="Not Recommended", TC=±100ppm/°C
R67: library part R0603_130K_1%_0.1W_100PPM, "Resistor - 1%", Case=0603, Manufacturer=GENERIC, Manufacturer1 ComponentHeight=0.55mm, Manufacturer1 Example="NIC COMPONENT", Manufacturer1 Part Number=NRC06F1303TRF, Power=0.1W, Tolerance=±1%, Author="CERN DEM JLC", Component Type=Standard, CreateDate=03.12.2007, HelpURL=\\cern.ch\dfs\Applications\Altium\Datasheets\R0603_NIC_NRC.pdf, LatestRevisionDate=13.03.2008, Manufacturer Part Number=R0603_130K_1%_0.1W_100PPM, Mounted=Yes, Part Description="General Purpose Thick Film Chip Resistor", Part Number=R0603_130K_1%_0.1W_100PPM, Pin Count=2, PressFit=No, Sense=No, SMD=Yes, Socket=No, Status=Preferred, TC=±100ppm/°C
R69: library part R0402_2K_1%_0.0625W_100PPM, "Resistor - 1%", Case=0402, Manufacturer=GENERIC, Manufacturer1 ComponentHeight=0.4mm, Manufacturer1 Example="YAGEO PHYCOMP", Manufacturer1 Part Number=232270672002L, Power=0.0625W, Tolerance=±1%, Author="CERN DEM JLC", Component Type=Standard, CreateDate=03.12.2007, HelpURL=\\cern.ch\dfs\Applications\Altium\Datasheets\R0402_Phycomp_RC0402.pdf, LatestRevisionDate=17.10.2012, Manufacturer Part Number=R0402_2K_1%_0.0625W_100PPM, Mounted=Yes, Part Description="General Purpose Thick Film Chip Resistor", Part Number=R0402_2K_1%_0.0625W_100PPM, Pin Count=2, PressFit=No, Sense=No, SMD=Yes, Socket=No, Status="Not Recommended", TC=±100ppm/°C
R70: library part R0603_15K_1%_0.1W_100PPM, "Resistor - 1%", Case=0603, Manufacturer=GENERIC, Manufacturer1 ComponentHeight=0.55mm, Manufacturer1 Example="NIC COMPONENT", Manufacturer1 Part Number=NRC06F1502TRF, Power=0.1W, Tolerance=±1%, Author="CERN DEM JMW", Component Type=Standard, CreateDate=17.08.2015, HelpURL=\\cern.ch\dfs\Applications\Altium\Datasheets\R0603_NIC_NRC.pdf, LatestRevisionDate=17.08.2015, Manufacturer Part Number=R0603_15K_1%_0.1W_100PPM, Mounted=Yes, Part Description="General Purpose Thick Film Chip Resistor", Part Number=R0603_15K_1%_0.1W_100PPM, Pin Count=2, PressFit=No, Sense=No, SMD=Yes, Socket=No, Status=Preferred, TC=±100ppm/°C
R72 R73: library part R0603_24K_1%_0.1W_100PPM, "Resistor - 1%", Case=0603, Manufacturer=GENERIC, Manufacturer1 ComponentHeight=0.55mm, Manufacturer1 Example="NIC COMPONENT", Manufacturer1 Part Number=NRC06F2402TRF, Power=0.1W, Tolerance=±1%, Author="CERN DEM JLC", Component Type=Standard, CreateDate=03.12.2007, HelpURL=\\cern.ch\dfs\Applications\Altium\Datasheets\R0603_NIC_NRC.pdf, LatestRevisionDate=13.03.2008, Manufacturer Part Number=R0603_24K_1%_0.1W_100PPM, Mounted=Yes, Part Description="General Purpose Thick Film Chip Resistor", Part Number=R0603_24K_1%_0.1W_100PPM, Pin Count=2, PressFit=No, Sense=No, SMD=Yes, Socket=No, Status=Preferred, TC=±100ppm/°C
R75: library part R0603_43K_1%_0.1W_100PPM, "Resistor - 1%", Case=0603, Manufacturer=GENERIC, Manufacturer1 ComponentHeight=0.55mm, Manufacturer1 Example="NIC COMPONENT", Manufacturer1 Part Number=NRC06F4302TRF, Power=0.1W, Tolerance=±1%, Author="CERN DEM JLC", Component Type=Standard, CreateDate=03.12.2007, HelpURL=\\cern.ch\dfs\Applications\Altium\Datasheets\R0603_NIC_NRC.pdf, LatestRevisionDate=13.03.2008, Manufacturer Part Number=R0603_43K_1%_0.1W_100PPM, Mounted=Yes, Part Description="General Purpose Thick Film Chip Resistor", Part Number=R0603_43K_1%_0.1W_100PPM, Pin Count=2, PressFit=No, Sense=No, SMD=Yes, Socket=No, Status=Preferred, TC=±100ppm/°C
R76: library part R0603_8K2_1%_0.1W_100PPM, "Resistor - 1%", Case=0603, Manufacturer=GENERIC, Manufacturer1 ComponentHeight=0.55mm, Manufacturer1 Example="NIC COMPONENT", Manufacturer1 Part Number=NRC06F8201TRF, Power=0.1W, Tolerance=±1%, Author="CERN DEM JLC", Component Type=Standard, CreateDate=03.12.2007, HelpURL=\\cern.ch\dfs\Applications\Altium\Datasheets\R0603_NIC_NRC.pdf, LatestRevisionDate=13.03.2008, Manufacturer Part Number=R0603_8K2_1%_0.1W_100PPM, Mounted=Yes, Part Description="General Purpose Thick Film Chip Resistor", Part Number=R0603_8K2_1%_0.1W_100PPM, Pin Count=2, PressFit=No, Sense=No, SMD=Yes, Socket=No, Status=Preferred, TC=±100ppm/°C
R78: library part R0402_1K_1%_0.0625W_100PPM, "Resistor - 1%", Case=0402, Manufacturer=GENERIC, Manufacturer1 ComponentHeight=0.4mm, Manufacturer1 Example="YAGEO PHYCOMP", Manufacturer1 Part Number=232270671002L, Power=0.0625W, Tolerance=±1%, Author="CERN DEM JLC", Component Type=Standard, CreateDate=03.12.2007, HelpURL=\\cern.ch\dfs\Applications\Altium\Datasheets\R0402_Phycomp_RC0402.pdf, LatestRevisionDate=17.10.2012, Manufacturer Part Number=R0402_1K_1%_0.0625W_100PPM, Mounted=Yes, Part Description="General Purpose Thick Film Chip Resistor", Part Number=R0402_1K_1%_0.0625W_100PPM, Pin Count=2, PressFit=No, Sense=No, SMD=Yes, Socket=No, Status="Not Recommended", TC=±100ppm/°C
Tr1: library part XFMR_COILCRAFT_FA2925-AL, "Flyback Transformer", Manufacturer=COILCRAFT, Manufacturer Part Number=FA2925-AL, Author="CERN DEM MR", ComponentHeight=12.7mm, Component Type=Standard, CreateDate=14.02.2018, HelpURL=\\cern.ch\dfs\Applications\Altium\Datasheets\XFMR_COILCRAFT_FA2925-AL.pdf, LatestRevisionDate=14.02.2018, Mounted=Yes, Part Description="Flyback Transformer For Silicon Laboratories Si3402 PD Controller", Part Number=XFMR_COILCRAFT_FA2925-AL, Pin Count=10, Sense=No, SMD=Yes, Socket=No, Status=None

## Nets (pads, with @x,y where several pads share a name; then routed paths per layer and width w, separated by ;. In a path a pad name is that pad's centre, name@x,y a point inside that pad or via, vN(x,y) a via of type N, cw(c..) or ccw(c..) an arc to the next point about the centre after c; other vN are vias at no path point)
12V_POE: C21.1 C23.2 C67.1 C68.1 C75.2 D9.1 IC10.2 R61.2 R64.1 R67.2 R74.1 R115.1
GND: C18.2 C21.2 C22.2 C23.1 C25.1 C67.2 C68.2 IC5.3 IC10.1 IC10.3 J2.9 J3.9 R70.1 R76.2 Tr1.7 Tr1.8
GNDHS: C36.2 C70.1 C71.1 C72.1 C73.1 IC1.7 IC1.17 IC1.19 LD6.1
NetC19_2: C19.2 FB4.1 IC1.10
NetC24_1: C24.1 R78.2
NetC25_2: C25.2 R77.1
NetC69_1: C69.1 D9.2 Tr1.9 Tr1.10
NetC69_2: C69.2 R61.1
NetC74_1: C74.1 FB5.2 IC1.14
NetC75_1: C75.1 R69.2
NetC76_2: C76.2 FB2.1 IC1.13
NetC77_2: C77.2 C78.2 R66.1
NetC79_1: C79.1 C80.2
NetC79_2: C79.2 R116.1
NetC80_1: C80.1 IC5.1 R67.1 R69.1 R70.2
NetC81_2: C81.2 IC1.3 R62.2 R63.2
NetC82_2: C82.2 IC1.4
NetC83_1: C83.1 FB6.2 IC1.11
NetD10_2: D10.2 D11.2
NetD11_1: D11.1 IC1.18 Tr1.1
NetIC1_1: IC1.1 IC2.3 R62.1 R63.1 R66.2
NetIC1_5: IC1.5 R73.2
NetIC1_6: IC1.6 R72.1
NetIC1_8: IC1.8 R71.2
NetIC2_1: IC2.1 R64.2 R115.2
NetIC2_2: IC2.2 IC5.2 R116.2
NetIC10_4: IC10.4 R75.1 R76.1 R78.1
NetIC10_5: IC10.5 R77.2
NetIC10_6: IC10.6 R74.2
NetIC10_8: IC10.8 L2.1
NetJ2_3: J2.3 J3.3
NetJ2_4: J2.4 J3.4
NetJ2_5: J2.5 J3.5
NetJ2_6: J2.6 J3.6
NetJ2_7: J2.7 J3.7
NetJ2_8: J2.8 J3.8
NetJ2_10: J2.10 J3.10
NetLD6_2: LD6.2 R73.1
P5V0: C22.1 C24.2 J2.1 J3.1 L2.2 R75.2
P12V0: J3.2
POE_VC1: FB5.1 J5.4
POE_VC1+: C20.2 C36.1 C70.2 C71.2 C72.2 C73.2 D10.1 IC1.2 IC1.12 IC1.16 IC1.20 J5.3 R72.2 Tr1.2
POE_VC1-: C18.1 C19.1 C20.1 C74.2 C76.1 C83.2 IC1.9 IC1.21 J5.5 R71.1
POE_VC2: FB2.2 J5.6
POE_VC3: FB6.1 J5.8
POE_VC4: FB4.2 J5.10
VSSA: C77.1 C78.1 C81.1 C82.1 IC1.15 IC2.4
pads on no net: Designator97.1 Designator97.2 Designator97.3 Designator97.4 Designator97.5 Designator97.6 Designator97.7 Designator97.8 Designator97.9 Designator97.10 IC10.7 J2.2 J5.1 J5.2 J5.7 J5.9 LD6.3 Tr1.3 Tr1.4 Tr1.5 Tr1.6

## Silkscreen, mask and mechanical layers (free items; w line width, h text height)
TopOverlay:
  text "PoE PD" at 3.725,53.825 h2
  text "PoE ON" at 12.275,19 h1.2
Mechanical1:
  lines w0.254: 0,0.35 0,0 ; 0,0 0,0.15 ; 0,0 21.4,0 21.4,4.5 19.9,4.5 19.9,9.9 19.6,10.2 16.8,10.2 16.8,10.9 19.6,10.9 19.9,11.2 19.9,14.5 21.4,14.5 21.4,43.8 19.9,43.8 19.9,49.2 19.8,49.3 19.6,49.5 16.8,49.5 16.8,50.2 19.6,50.2 19.9,50.5 19.9,53.8 21.4,53.8 21.4,58.3 19.9,58.3 19.9,63.7 19.8,63.8 19.6,64 16.8,64 16.8,64.7 19.6,64.7 19.9,65 19.9,68.3 21.4,68.3 21.4,72.8 0,72.8 0,68.3 1.5,68.3 1.5,65 1.8,64.7 4.6,64.7 4.6,64 1.9,64 1.5,63.6 1.5,58.3 0,58.3 0,43.8 0,0.15 ; 0,0.15 0,0.15

## Text inside footprints (layer, text, board x,y; h text height)
Designator97: TopOverlay "1" at 13.725,10.03 h1.2 r90; Mechanical14 "1" at 13.725,10.03 h1.2 r90
J2: TopOverlay "1" at 7.025,66.55 h1.2; TopOverlay "5" at 6.725,58.57 h1.2; BottomOverlay "6" at 7.15,67.75 h1.2 r180; BottomOverlay "10" at 6.85,59.77 h1.2 r180
J3: TopOverlay "5" at 13.875,58.725 h1.2; TopOverlay "1" at 14.175,66.705 h1.2; BottomOverlay "10" at 13,59.925 h1.2 r180; BottomOverlay "6" at 14.05,67.905 h1.2 r180
J5: TopOverlay "5" at 13.825,5 h1.2; TopOverlay "1" at 14.125,12.98 h1.2; BottomOverlay "10" at 12.95,6.2 h1.2 r180; BottomOverlay "6" at 14,14.18 h1.2 r180